# Altium PCB OSHparkMini.PcbDoc
Units mm, origin at the board's own origin, x right, y up, seen from the top; angles counter-clockwise.
Board outline 37 x 27 mm, 2 copper layers (Top Layer, Bottom Layer); 30 components, 26 nets, 147 pads, 17 vias.
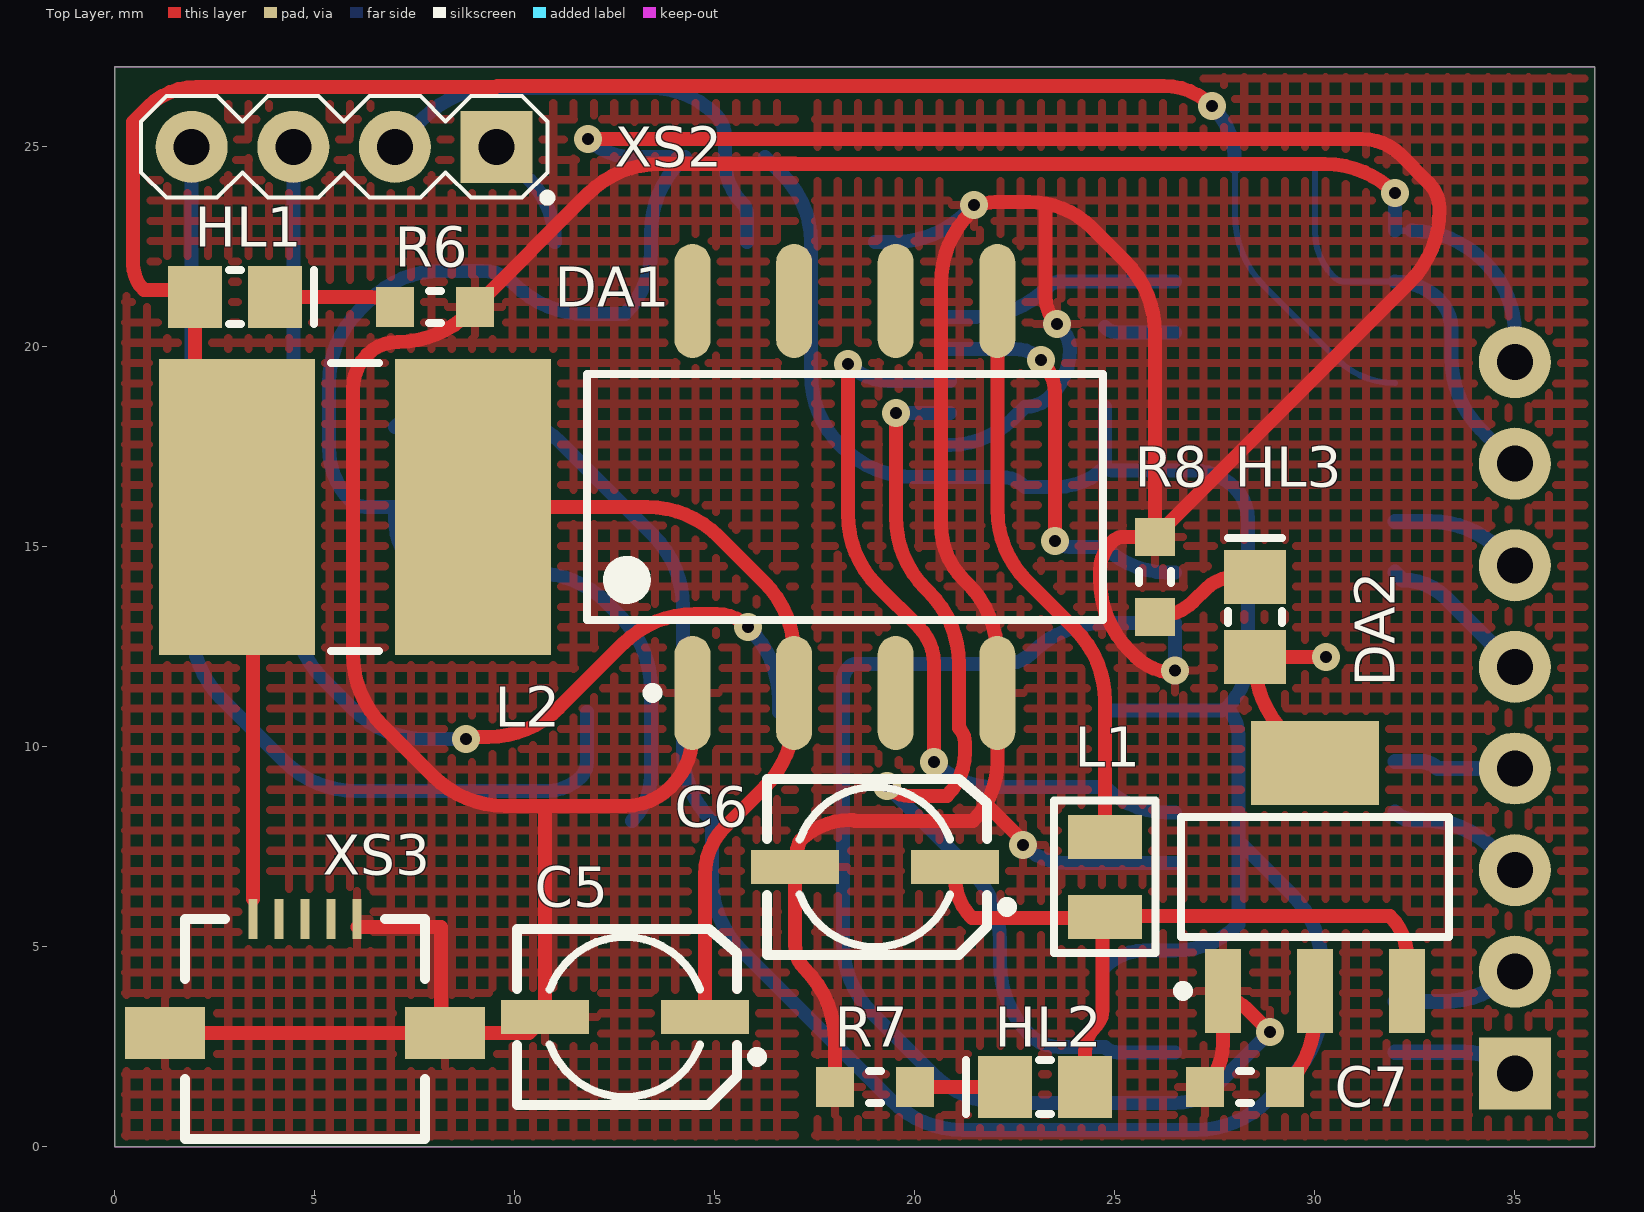
[diagram p0: Top Layer view]
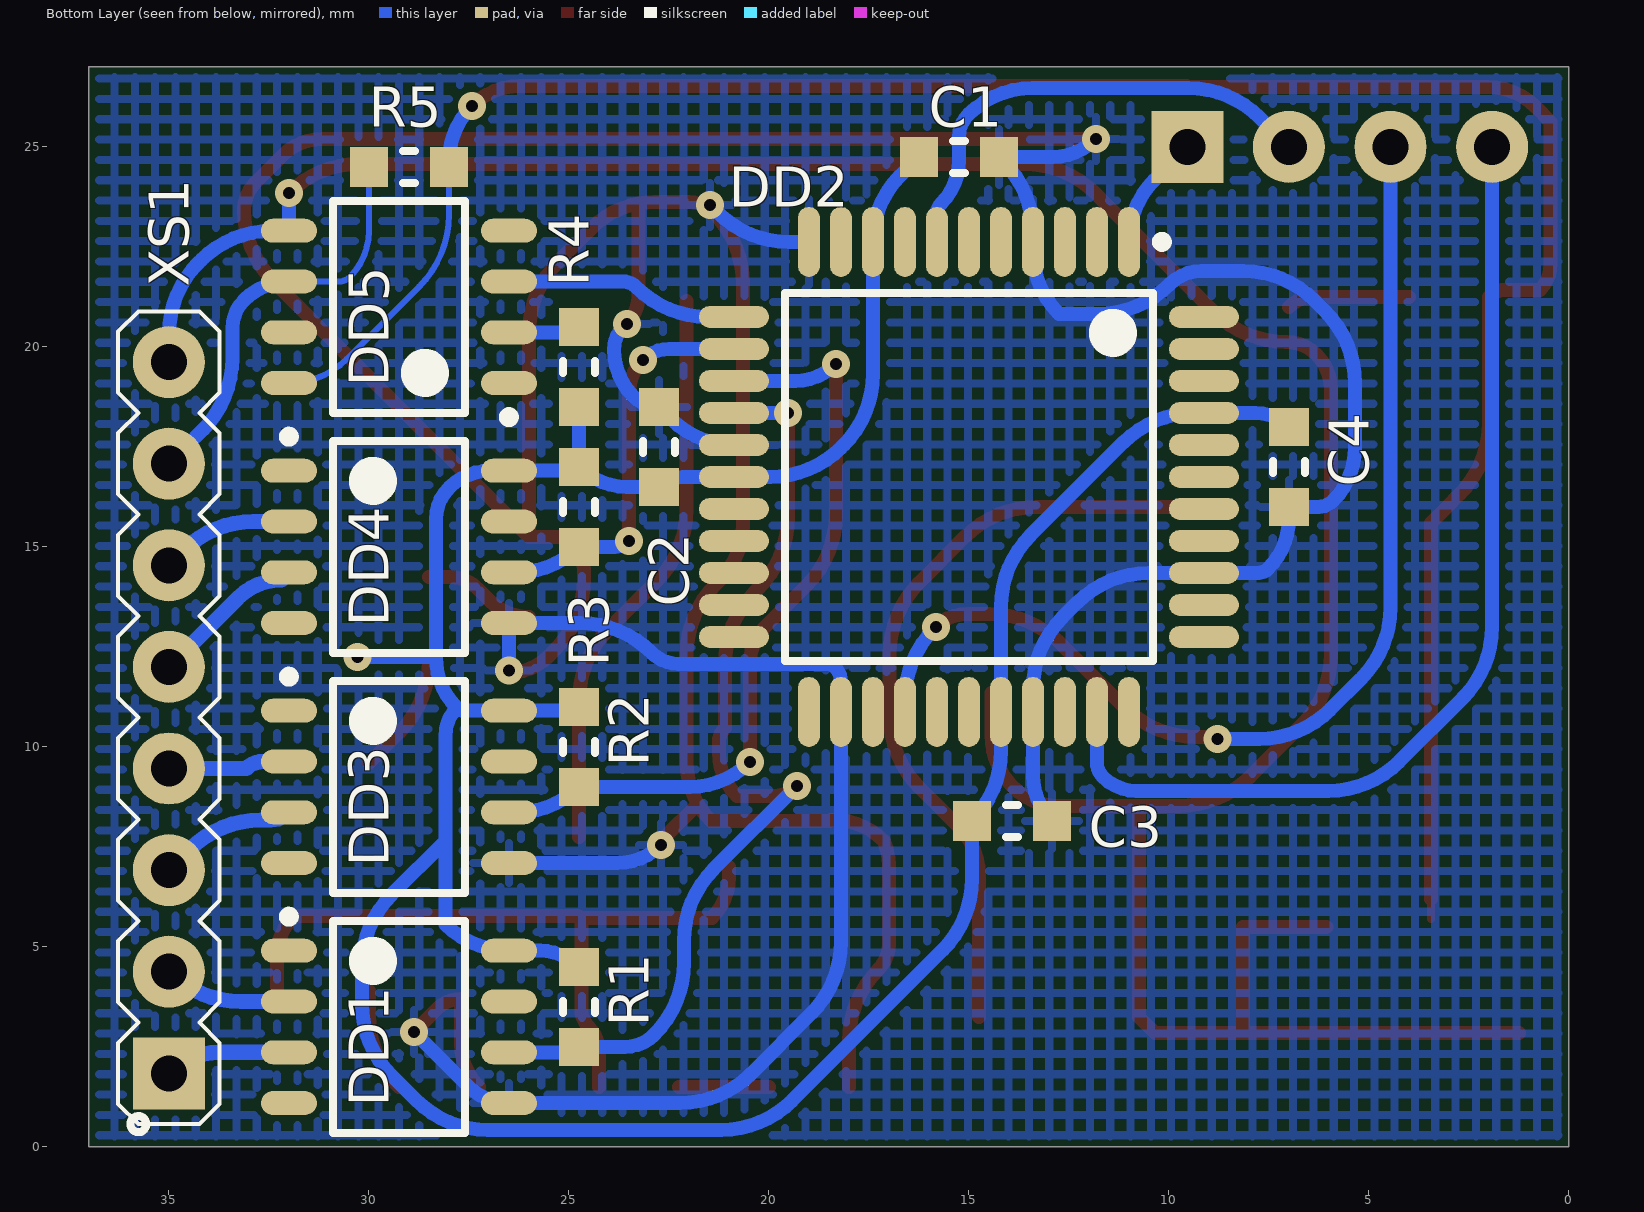
[diagram p1: Bottom Layer view, seen from below]

## Layer stack, top to bottom
Top Solder: solder mask 0.0102, Solder Resist, Dk 3.5
Top Layer: signal copper 0.0356
Dielectric 1: dielectric 0.32, FR-4, Dk 4.8
Bottom Layer: signal copper 0.0356
Bottom Solder: solder mask 0.0102, Solder Resist, Dk 3.5

## Board outline
0,0 0,27 37,27 37,0

## Design rules (kind name [scope] priority, off if disabled: settings)
AcuteAngle [All] p1: minimum=6.00000000000000E+0001 checktracksonly=FALSE
Clearance [All] p1: gap=0.152 ignorepadtopadclearanceinfootprint=FALSE
DiffPairsRouting [All] p1: maxlimit=0.254 minlimit=0.254 mostfreqgap=0.254 toplayer_minwidth=0.381 toplayer_maxwidth=0.381 toplayer_prefwidth=0.381 bottomlayer_minwidth=0.381 bottomlayer_maxwidth=0.381 bottomlayer_prefwidth=0.381 maxuncoupledlength=12.7
HoleSize "HoleSize plated" [PadIsPlated] p1: absolutevalues=TRUE maxlimit=3 minlimit=0.254 maxpercent=80.000 minpercent=20.000
HoleSize "HoleSize not plated" [Not PadIsPlated] p2: absolutevalues=TRUE maxlimit=3 minlimit=0.254 maxpercent=80.000 minpercent=20.000
HoleToHoleClearance [All] p1: gap=0.2 allowstackedmicrovias=TRUE
MinimumAnnularRing AnnularRing_VIA [IsVia] p1: minimumring=0.127
MinimumAnnularRing AnnularRing_PAD [IsPad] p2: minimumring=0.127
MinimumSolderMaskSliver [All] p1: minsoldermaskwidth=0.15
NetAntennae [All] p1: netantennaetolerance=1
PlaneClearance [All] p1: clearance=0.5
PlaneConnect [All] p1: planeconnectstyle=Relief reliefexpansion=0.2 reliefentries=4 reliefconductorwidth=0.2 reliefairgap=0.2
PolygonConnect [All] p1: connectstyle=Relief reliefconductorwidth=0.2 reliefentries=4 polygonreliefangle="90 Angle" airgapwidth=0.2
RoomDefinition main [InComponentClass('main')] p1: confinementstyle=ConfineIn formatcopy=TRUE lockcomponents=FALSE outline 0,-0.05 37.25,-0.05 37.25,27 0,27
RoutingVias [All] p1: holewidth=0.3 width=0.7 viastyle="Through Hole" minholewidth=0.3 minwidth=0.7 maxholewidth=0.3 maxwidth=0.7
SMDNeckDown [All] p1: percent=90.000
SMDToCorner [All] p1: distance=0
SilkToBoardRegionClearance [All] p1 off:
SilkToSilkClearance [All] p1: silktosilkclearance=0.2
SilkToSolderMaskClearance [IsPad] p1: minsilkscreentomaskgap=0.25 clearancetoexposedcopper=TRUE
SolderMaskExpansion [All] p1: expansion=0.05
Width [All] p1: maxlimit=1.5 minlimit=0.152 preferedwidth=0.35
20 further rules are at their usual default settings.

## Classes and differential pairs
net class QuadratureSignal: QA_N QA_P QB_N QB_P Z_N Z_P
differential pair Z: +Z_P -Z_N
differential pair QB: +QB_P -QB_N
differential pair QA: +QA_P -QA_N

## Components (designator, comment, footprint, x,y, rotation, side; value= is the part's Value field where it differs from the comment)
C1 "100n" SMDRC0603 15.25,24.75 r0 bottom
C2 "100n" SMDRC0603 22.75,17.5 r270 bottom
C3 "100n" SMDRC0603 13.925,8.15 r0 bottom
C4 "100n" SMDRC0603 7,17 r90 bottom
C5 "10 мк 16 В" CAP_POLAR_ELLYTE_B 12.75,3.25 r180 top
C6 "10 мк 16 В" CAP_POLAR_ELLYTE_B 19,7 r180 top
C7 "100n" SMDRC0603 28.25,1.5 r0 top
DA1 "AM1L-1205S-NZ" SOP254P1120X625-8M 18.25,16.25 r90 top
DA2 "LD1117A" SOT230P700X180-4L 30,6.75 r90 top
DD1 "HCPL-0601" HCPL-1601 29.25,3 r180 bottom
DD2 "EPM3064ATC44-10N" TQFP80P1200X1230X120-44N 15,16.75 r270 bottom
DD3 "HCPL-0601" HCPL-1601 29.25,9 r180 bottom
DD4 "HCPL-0601" HCPL-1601 29.25,15 r180 bottom
DD5 "HCPL-0601" HCPL-1601 29.25,21 r0 bottom
HL1 "KP-2012SGC" DIOMELF2012M 3,21.25 r0 top
HL2 "KP-2012SGC" DIOMELF2012M 23.25,1.5 r180 top
HL3 "KP-2012SGC" DIOMELF2012M 28.5,13.25 r90 top
L1 "10 мкГн" MLZ2012 24.75,6.75 r270 top
L2 "330 мкГн" INDP7972X50M 6,16 r180 top
R1 "1k" SMDRC0603 24.75,3.5 r90 bottom
R2 "1k" SMDRC0603 24.75,10 r90 bottom
R3 "1k" SMDRC0603 24.75,16 r90 bottom
R4 "100" SMDRC0603 24.75,19.5 r270 bottom
R5 "1k" SMDRC0603 29,24.5 r180 bottom
R6 "220" SMDRC0603 8,21 r180 top
R7 "220" SMDRC0603 19,1.5 r180 top
R8 "100" SMDRC0603 26,14.25 r270 top
XS1 "PLS-08R" PLS-08R1 35,1.84 r90 bottom
XS2 "PLS-4" PLS-04 9.54,25 r180 top
XS3 "5BFR" USB2.0microB 4.75,5.7 r180 top

## Footprints (in the part's own frame and the unit in brackets; to place one, negate y for a bottom-side part, rotate by r counter-clockwise, add the part's x,y. Pads: shape width x height; smd on the part's side, far side on the other; paste and mask are expansions set on the pad)
CAP_POLAR_ELLYTE_B [mm] "Surface Mount Aluminum Electrolytic (size code B)"
  rect 2.2x0.85 smd: 1(2,0) 2(-2,0)
  silkscreen extent -3.43,-2.2 2.7,2.2, body extent -2.3,-2.15 2.3,2.15, height 5.41
DIOMELF2012M [mm] "MELF Diode, 2-Leads, Body 2,00x1,20mm, IPC Low Density"
  rect 1.35x1.55 smd: 1(-1,0) 2(1,0)
  silkscreen extent -0.15,-0.67 1.97,0.67, body extent -1,-0.6 1,0.6, height 1.2
HCPL-1601 [mm] "SOIC, 8-Leads, Body 5,21x3,94mm, Pitch 1,27mm, IPC Medium Density"
  oval 1.4x0.6 smd: 1(-2.75,1.905) 2(-2.75,0.635) 3(-2.75,-0.635) 4(-2.75,-1.905) 5(2.75,-1.905) 6(2.75,-0.635) 7(2.75,0.635) 8(2.75,1.905)
  silkscreen extent -2.88,-2.65 1.65,2.88, body extent -3,-2.65 3,2.65, height 3.3
INDP7972X50M [mm] "Precision Wire Wound Inductor, 2-Leads, Body 7,90x7,20mm, IPC Low Density"
  rect 3.9x7.4 smd: 1(-2.95,0) 2(2.95,0)
  silkscreen extent -0.6,-3.6 0.6,3.6, body extent -3.95,-3.6 3.95,3.6, height 5
MLZ2012 [mm]
  rect 1.1x1.85 smd: 1(-1,0) 2(1,0)
  silkscreen extent -1.91,-1.27 1.91,1.27, body extent -1,-0.6 1,0.6, height 1.3
PLS-04 [mm] "вилка на плату"
  rect 1.8x1.8 hole 0.9: 1(0,0)
  round 1.8 hole 0.9: 2(2.54,0) 3(5.08,0) 4(7.62,0)
  silkscreen extent -1.37,-1.27 8.89,1.37, body extent -1.27,-1.25 8.89,1.25, height 8.6
PLS-08R1 [mm] "угловая вилка на плату"
  rect 1.8x1.8 hole 0.9: 1(0,0)
  round 1.8 hole 0.9: 2(2.54,0) 3(5.08,0) 4(7.62,0) 5(10.16,0) 6(12.7,0) 7(15.24,0) 8(17.78,0)
  silkscreen extent -1.47,-1.27 19.05,1.27, body extent -1.28,-1.25 19.05,6, height 6.1
SMDRC0603 [mm] "Chip Resistor, 2-Leads, Body 1,60x0,80mm, IPC Low Density"
  rect 0.95x1 smd: 1(-1,0) 2(1,0)
  silkscreen extent -0.15,-0.4 0.15,0.4, body extent -0.8,-0.4 0.8,0.4, height 0.45
SOP254P1120X625-8M [mm] "SOP, 8-Leads, Body 12,70x7,25mm, Pitch 2,54mm, IPC Low Density"
  oval 2.85x0.9 smd: 1(-4.9,3.81) 2(-4.9,1.27) 3(-4.9,-1.27) 4(-4.9,-3.81) 5(4.9,-3.81) 6(4.9,-1.27) 7(4.9,1.27) 8(4.9,3.81)
  silkscreen extent -5.02,-6.45 3.08,6.45, body extent -3.75,-6.45 3.75,6.45, height 6.25
SOT230P700X180-4L [mm] "SOT223, 4-Leads, Body 6,50x7,00mm (avg), Pitch 2,30mm, IPC High Density"
  rect 2.1x0.9 smd: 1(-2.85,2.3) 2(-2.85,0) 3(-2.85,-2.3)
  rect 2.1x3.2 smd: 4(2.85,0)
  silkscreen extent -2.97,-3.35 1.5,3.42, body extent -1.85,-3.35 1.85,3.35, height 1.8
TQFP80P1200X1230X120-44N [mm] "TQFP, 44-Leads, Body 10,00x10,00mm, Pitch 0,80mm, IPC Medium Density"
  oval 1.75x0.55 smd: 1(-5.875,4) 2(-5.875,3.2) 3(-5.875,2.4) 4(-5.875,1.6) 5(-5.875,0.8) 6(-5.875,0) 7(-5.875,-0.8) 8(-5.875,-1.6) 9(-5.875,-2.4) 10(-5.875,-3.2) 11(-5.875,-4) 23(5.875,-4) 24(5.875,-3.2) 25(5.875,-2.4) 26(5.875,-1.6) 27(5.875,-0.8) 28(5.875,0) 29(5.875,0.8) 30(5.875,1.6) 31(5.875,2.4) 32(5.875,3.2) 33(5.875,4)
  oval 0.55x1.75 smd: 12(-4,-5.875) 13(-3.2,-5.875) 14(-2.4,-5.875) 15(-1.6,-5.875) 16(-0.8,-5.875) 17(0,-5.875) 18(0.8,-5.875) 19(1.6,-5.875) 20(2.4,-5.875) 21(3.2,-5.875) 22(4,-5.875) 34(4,5.875) 35(3.2,5.875) 36(2.4,5.875) 37(1.6,5.875) 38(0.8,5.875) 39(0,5.875) 40(-0.8,5.875) 41(-1.6,5.875) 42(-2.4,5.875) 43(-3.2,5.875) 44(-4,5.875)
  silkscreen extent -6,-4.6 4.6,4.95, body extent -6,-6.15 6,6.15, height 1.2
USB2.0microB [mm]
  rect 0.225x1 smd: D+(0,0) D-(0.65,0) GND(-1.3,0) ID(-0.65,0) VCC(1.3,0)
  rect 2x1.3 smd: SHIELD(-3.5,2.85) SHIELD(3.5,2.85)
  silkscreen extent -3,0 3,5.5, body extent -3.89,0 3.89,5.49, height 2.59

## Part data
C1 C2 C3 C4 C7: library part "Capacitor 0603 100n", "Generic capasitor non-polar", Package=0603, ComponentLink1Description=Datasheet, PartNumber="Capacitor 0603 100n"
C5 C6: library part 10000_016, "10uF 16V Polar SMD cap", Manufacturer=YAGEO, ManufacturerPartNumber=CA016M0010REB-0405, Package=штырьевой, ComponentLink1Description=Datasheet, ComponentLink2Description=Datasheet-local, Price=3,03, Supplier=-
DA1: "DC/DC Isolation", Manufacturer=AIMTEC, Package=SMD-8, ComponentLink1Description=Datasheet, ComponentLink1URL=http://www.aimtec.com/site/Aimtec/files/Datasheet/HighResolution/AM1L-N-Z.pdf, ManufacturerPartNumber=AM1L-1205S-NZ, Price=166,68, Supplier=Диджитек
DA2: library part LD1117AS33TR, "LDO регулятор напряжения 3.3V 1.0A Positive", Manufacturer=STMicroelectronics, ComponentLink1Description=http://www.mouser.com/ds/2/389/CD00002116-250310.pdf, ComponentLink1URL=http://www.mouser.com/ds/2/389/CD00002116-250310.pdf, ManufacturerPartNumber=LD1117AS33TR, Price=45
DD1 DD3 DD4 DD5: library part HCPL-0601-500E, "OPTOISO 3.75KV OPN COLLECTOR 8SO", Case/Package=SOIC, Forward Current=50mA, Forward Voltage=1.75V, Input Current=15mA, Isolation Voltage=3.75kV, Manufacturer="Fairchild Semiconductor", Max Operating Temperature=85°C, Max Output Voltage=7V, Max Power Dissipation=85mW, Min Operating Temperature=-40°C, Package Quantity=3000, Reverse Breakdown Voltage=5V, Supplier Part Number 1=512-HCPL0601, ComponentLink1Description=https://datasheet.ciiva.com/4698/hcpl0601-185320-4698727.pdf, ComponentLink1URL=https://datasheet.ciiva.com/4698/hcpl0601-185320-4698727.pdf, ComponentLink2Description=https://datasheet.ciiva.com/11772/0900766b80d1f17b-11772100.pdf, ComponentLink2URL=https://datasheet.ciiva.com/11772/0900766b80d1f17b-11772100.pdf, ComponentLink3Description=https://datasheet.ciiva.com/26912/hcpl0601-26912362.pdf, ComponentLink3URL=https://datasheet.ciiva.com/26912/hcpl0601-26912362.pdf, ComponentLink4Description=https://datasheet.ciiva.com/2083/hcpl0611-2083487.pdf, ComponentLink4URL=https://datasheet.ciiva.com/2083/hcpl0611-2083487.pdf, ComponentLink5Description=https://datasheet.ciiva.com/26162/hcpl0611-26162959.pdf, ComponentLink5URL=https://datasheet.ciiva.com/26162/hcpl0611-26162959.pdf, ComponentLink6Description=https://datasheet.ciiva.com/26910/getdatasheetpartid-81668-26910220.pdf, ComponentLink6URL=https://datasheet.ciiva.com/26910/getdatasheetpartid-81668-26910220.pdf, ComponentLink7Description=https://datasheet.ciiva.com/8074/1796808-8074123.pdf, ComponentLink7URL=https://datasheet.ciiva.com/8074/1796808-8074123.pdf, ComponentLink8Description=https://datasheet.ciiva.com/8100/hcpl0611-8100123.pdf, ComponentLink8URL=https://datasheet.ciiva.com/8100/hcpl0611-8100123.pdf, Data Rate=10Mbps, Direction=Unidirectional, Fall Time=12ns, Height=3.43mm, Lead Free="Lead Free", Length=5.13mm, ManufacturerPartNumber=HCPL-0601, Max Input Current=15mA, Max Output Current=50mA, Mount="Surface Mount", Number of Channels=1, Number of Elements=1, Number of Pins=8, Output Current=50mA, Output Current per Channel=50mA, Output Voltage=7V, Packaging=Rail/Tube, Polarity=Inverting, Power Dissipation=85mW, Pricing 1="1=2.35, 10=2, 100=1.6, 500=1.4, 1000=1.16, 3000=1.07, 6000=1.03, 9000=0.958 (USD)", Propagation Delay=75ns, Radiation Hardening=No, REACH SVHC="No SVHC", Reverse Voltage (DC)=5V, Rise Time=50ns, Stock 1=5013, Supplier 1=Mouser, Turn-On Delay Time=75ns, Weight=0.252g, Width=4.16mm
DD2: library part EPM3064ATC44, "MAX 3000A, 64 MACROCELLS", Case/Package=TQFP, Frequency=125MHz, Manufacturer=Altera, Max Frequency=222.2MHz, Max Operating Temperature=70°C, Max Supply Voltage=3.6V, Min Operating Temperature=0°C, Min Supply Voltage=3V, Operating Supply Voltage=3.3V, Package Quantity=160, Supplier Part Number 1=544-1977-ND, ComponentLink1Description=https://datasheet.ciiva.com/1407/m3000a-1407040.pdf, ComponentLink1URL=https://datasheet.ciiva.com/1407/m3000a-1407040.pdf, ComponentLink2Description=https://datasheet.ciiva.com/1152/134639-1152985.pdf, ComponentLink2URL=https://datasheet.ciiva.com/1152/134639-1152985.pdf, ComponentLink3Description=https://datasheet.ciiva.com/25922/m3000a-25922153.pdf, ComponentLink3URL=https://datasheet.ciiva.com/25922/m3000a-25922153.pdf, ComponentLink4Description=https://datasheet.ciiva.com/5702/m3000a-5702171.pdf, ComponentLink4URL=https://datasheet.ciiva.com/5702/m3000a-5702171.pdf, ComponentLink5Description=https://datasheet.ciiva.com/1152/134639-1152983.pdf, ComponentLink5URL=https://datasheet.ciiva.com/1152/134639-1152983.pdf, ComponentLink6Description=https://datasheet.ciiva.com/1161/m3000a-1161336.pdf, ComponentLink6URL=https://datasheet.ciiva.com/1161/m3000a-1161336.pdf, ComponentLink7Description=https://datasheet.ciiva.com/5702/m3000a-5702168.pdf, ComponentLink7URL=https://datasheet.ciiva.com/5702/m3000a-5702168.pdf, Height=0.95mm, Lead Free="Lead Free", Length=10mm, ManufacturerPartNumber=EPM3064ATC44-10N, Memory Type=EEPROM, Mount="Surface Mount", Number of Gates=1250, Number of I/Os=34, Number of Inputs=34, Number of Logic Blocks (LABs)=4, Number of Logic Elements/Cells=4, Number of Macrocells=64, Number of Pins=44, Number of Programmable I/O=34, Packaging=Tray, Pricing 1="1=2.93 (USD)", Propagation Delay=10ns, Radiation Hardening=No, REACH SVHC=Unknown, Speed Grade=10, Stock 1=1163, Supplier 1=Digi-Key, Termination=SMD/SMT, Turn-On Delay Time=10ns, Width=10mm
HL1 HL2 HL3: library part LED1_G, "Diod LED SMD Green", Color=Green, ComponentLink1Description=Datasheet, ComponentLink2Description=Datasheet-local, ManufacturerPartNumber=KP-2012SGC, Price=2,88
L1: library part MLZ2012N100LT, "Катушка 500mA 10мкГн", Manufacturer=TDK, ManufacturerPartNumber=MPZ1608S181A, Package=2012, ComponentLink1Description=Datasheet, ComponentLink1URL=http://www.mouser.com/ds/2/400/inductor_commercial_decoupling_mlz_en-348849.pdf, ComponentLink2Description=Datasheet-local, Supplier=Промэлектроника
L2: library part SCD0705T-331K-N, "Inductor", ComponentLink1Description=Datasheet, ComponentLink1URL=http://download.siliconexpert.com/pdfs/2010/12/8/6/47/4/732/yageo_/manual/inductors_smdpower_scd_2010.pdf, ComponentLink2Description=Datasheet-local, ManufacturerPartNumber=SCD0705T-331K-N
R1 R2 R3 R5: library part "Resistor 0603 1k", "Generic resistor", Package=0603, ComponentLink1Description=Datasheet, ComponentLink1URL=http://www.mouser.com/ds/2/447/PYu-RC0402_51_RoHS_L_6_r-8721.pdf, PartNumber="Resistor 0603 1k"
R4 R8: library part "Resistor 0603 100", "Generic resistor", Package=0603, ComponentLink1Description=Datasheet, ComponentLink1URL=http://www.mouser.com/ds/2/447/PYu-RC0402_51_RoHS_L_6_r-8721.pdf, PartNumber="Resistor 0603 100"
R6 R7: library part "Resistor 0603 220", "Generic resistor", Package=0603, ComponentLink1Description=Datasheet, ComponentLink1URL=http://www.mouser.com/ds/2/447/PYu-RC0402_51_RoHS_L_6_r-8721.pdf, PartNumber="Resistor 0603 220"
XS1: library part "Con8_M PLS-08MR", "Male 8-pin connection", ComponentLink1Description=Datasheet, ComponentLink1URL=http://www.promelec.ru/catalog/406/1218/1223/1/99528/, ComponentLink2Description=Datasheet-local, ManufacturerPartNumber=PLS-08R, Price=1
XS2: library part Con4_M_PLS-4, "Male 4-pin connection", ComponentLink1Description=Datasheet, ComponentLink1URL=http://www.promelec.ru/catalog/406/1218/1224/1/24233/, ComponentLink2Description=Datasheet-local, ManufacturerPartNumber=PLS-4, Price=1
XS3: library part "USB2.0-microB 5BFR", "Роезтка microUSB угловая", Manufacturer=?, ManufacturerPartNumber="microUSB 5BFR", Note=5BFR, Price=29.91

## Via types
v1: diameter 0.7, hole 0.3, Top Layer to Bottom Layer, 17 vias

## Nets (pads, with @x,y where several pads share a name; then routed paths per layer and width w, separated by ;. In a path a pad name is that pad's centre, name@x,y a point inside that pad or via, vN(x,y) a via of type N, cw(c..) or ccw(c..) an arc to the next point about the centre after c; other vN are vias at no path point)
+3V_INT: C1.2 C2.2 C3.2 C4.2 C7.2 DA2.2 DA2.4 DD1.8 DD2.9 DD2.17 DD2.29 DD2.41 DD3.8 DD4.8 HL3.1 R1.2 R2.2 R3.2 R4.2 | length 88.9
  Top Layer w0.35: C7.2 29.256,1.506 ccw(c27.46,3.302) 30,3.302 DA2.2 ; DA2.4 29.244,10.356 cw(c31.04,12.152) 28.5,12.152 HL3.1 v1(30.279,12.25)
  Bottom Layer w0.35: C4.2 cw(c7.845,17.155) 7.845,18.35 DD2.41 9.348,18.35 cw(c9.348,15.81) 11.144,17.606 13.456,15.294 cw(c11.66,13.498) 14.2,13.498 DD2.29 14.2,9.9 ccw(c16.675,9.9) C3.2 14.925,6.702 ccw(c17.465,6.702) 15.669,4.906 19.406,1.169 ; C1.2 16.711,24.289 cw(c15.046,22.625) DD2.9 17.4,19.327 ccw(c19.94,19.327) 18.144,17.531 18.181,17.494 ccw(c19.977,19.29) 19.977,16.75 DD2.17 22.146,16.75 cw(c22.146,15.896) C2.2 23.543,16.5 ccw(c23.543,18.207) R3.2 ; 19.406,1.169 ccw(c21.202,2.965) 21.202,0.425 27.023,0.425 ccw(c27.023,2.965) 28.819,1.169 ; R1.2 cw(c25.728,3.522) 25.728,4.905 DD1.8 ccw(c26.5,7.15) 28.088,5.563 28.088,7.65 ; R2.2 ccw(c24.979,11.229) 24.979,10.905 DD3.8 27.631,10.905 ccw(c27.631,11.144) 27.8,10.975 ; R4.2 R3.2 ; 28.819,1.169 29.431,1.781 ccw(c27.635,3.577) 30.175,3.577 30.175,4.51 ccw(c27.635,4.51) 29.431,6.307 28.088,7.65 ; v1(30.279,12.25) ccw(c30.279,12.421) 30.4,12.3 cw(c30.261,12.439) 30.261,12.242 28.325,12.242 ; R3.2 ccw(c24.979,17.229) 24.979,16.905 DD4.8 26.962,16.905 cw(c26.962,15.437) 28,16.475 cw(c27.215,15.69) 28.325,15.69 28.325,12.242 ; 27.8,10.975 ccw(c26.533,12.242) 28.325,12.242 ; 27.8,10.975 cw(c27.106,10.281) 28.088,10.281 28.088,7.65
+5V_EXT: DD5.8 HL1.1 L2.2 R5.2 XS3.VCC | length 58.1
  Top Layer w0.203: XS3.VCC XS3.VCC@3.45,6.2
  Top Layer w0.35: XS3.VCC@3.45,6.2 3.45,15.6 L2.2 2.744,16.306 cw(c4.54,18.102) 2,18.102 HL1.1 ccw(c1.578,20.828) 1.578,21.425 0.725,21.425 cw(c1.372,22.072) 0.457,22.072 0.457,25.628 0.827,25.998 cw(c2.038,24.788) 2.038,26.5 9.525,26.5 cw(c9.585,26.44) 9.585,26.525 26.218,26.525 cw(c26.218,24.818) v1(27.425,26.025)
  Bottom Layer w0.152: R5.2 28,23.302 ccw(c30.54,23.302) 28.744,21.506 30.558,19.692 ccw(c32,21.135) DD5.8
  Bottom Layer w0.35: v1(27.425,26.025) cw(c26.037,24.637) 28,24.637 R5.2
+5V_INT: C6.2 DA2.3 HL2.1 L1.2 | length 18.2
  Top Layer w0.35: C6.2 21,6.751 ccw(c22.451,6.751) 21.425,5.725 L1.2@24.69,5.725 ; HL2.1 24.25,2.361 cw(c25.189,2.361) 24.525,3.025 ccw(c24.128,3.422) 24.69,3.422 L1.2@24.69,5.725 ; DA2.3 32.3,4.749 ccw(c30.849,4.749) 31.875,5.775 24.81,5.775 ccw(c24.81,5.604) L1.2@24.69,5.725
GND: C1.1 C2.1 C3.1 C4.1 C6.1 C7.1 DA1.4 DA2.1 DD1.5 DD2.4 DD2.11 DD2.16 DD2.24 DD2.30 DD2.36 DD3.5 DD4.5 R7.2 R8.1 | length 160
  Top Layer w0.35: v1(11.825,25.2) 31.165,25.2 cw(c31.165,23.794) 32.16,24.788 32.833,24.115 cw(c32.139,23.422) 32.867,24.078 cw(c32.139,23.422) 33.118,23.474 cw(c32.139,23.422) 33.12,23.422 cw(c30.58,23.422) 32.376,21.626 R8.1 ; R7.2 18,2.648 ccw(c15.46,2.648) 17.256,4.444 cw(c17.874,5.062) 17,5.062 C6.1 17,7.028 cw(c18.622,7.028) 17.123,7.649 cw(c18.394,6.379) 18.394,8.175 18.45,8.175 ccw(c18.51,8.235) 18.51,8.15 21.45,8.15 ccw(c19.977,9.623) 21.777,8.574 ; v1@22.781,7.469 v1(22.7,7.55) ccw(c22.457,7.55) 22.629,7.722 21.777,8.574 ; v1(23.55,20.575) cw(c24.246,21.271) 23.262,21.271 23.262,23.588 ; v1(26.5,11.91) ccw(c26.585,11.91) 26.525,11.85 cw(c26.525,13.299) 25.501,12.274 25.369,12.406 cw(c27.165,14.202) 24.625,14.202 24.625,14.401 cw(c25.649,14.401) 24.925,15.125 cw(c25.227,14.823) 25.227,15.25 R8.1 ; C7.1 ccw(c26.164,2.586) 27.7,2.586 27.7,3.7 cw(c27.7,2.855) 28.297,3.453 v1(28.875,2.875) ; 21.777,8.574 ccw(c19.977,9.623) 22.06,9.623 DA1.4 22.06,12.288 ccw(c19.52,12.288) 21.316,14.084 21.225,14.175 cw(c22.613,15.563) 20.65,15.563 20.65,21.573 cw(c23.19,21.573) 21.394,23.369 cw(c22.012,22.751) 22.012,23.625 22.856,23.625 cw(c22.856,21.406) 23.262,23.588 ; 23.262,23.588 cw(c22.856,21.406) 24.425,22.975 25.256,22.144 cw(c23.46,20.348) 26,20.348 R8.1
  Bottom Layer w0.35: v1(11.825,25.2) ccw(c12.911,26.286) 12.911,24.75 C1.1 14.144,24.644 ccw(c15.94,22.848) 13.4,22.848 DD2.4 13.4,22.394 cw(c11.181,22.394) 12.75,20.825 11.777,20.825 cw(c11.777,23.365) 9.981,21.569 ccw(c9.182,20.77) 9.182,21.9 8.152,21.9 ccw(c8.152,19.36) 6.356,21.156 6.094,20.894 ccw(c7.89,19.098) 5.35,19.098 5.35,17.478 ccw(c7.228,17.478) 5.9,16.15 ccw(c6.262,16.512) 6.262,16 C4.1 7,15.717 ccw(c8.792,15.717) 7.525,14.45 ccw(c7.766,14.691) 7.766,14.35 DD2.36 10.498,14.35 cw(c10.498,11.81) 12.294,13.606 12.656,13.244 cw(c10.86,11.448) 13.4,11.448 DD2.30 13.4,9.297 cw(c11.778,9.297) C3.1 ; DD2.11 19.498,22.625 ccw(c19.498,25.165) 21.294,23.369 v1(21.475,23.55) ; DD2.16 ccw(c20.875,19.783) 22.454,18.204 C2.1 ccw(c22.75,19.405) 23.39,18.765 ccw(c22.22,19.936) 23.875,19.936 ccw(c23.116,19.936) 23.653,20.472 v1(23.55,20.575) ; v1(22.7,7.55) ccw(c23.798,8.648) 23.798,7.095 DD3.5 ; v1(26.5,11.91) DD4.5 24.722,13.095 ccw(c24.722,10.555) 22.926,12.351 cw(c22.264,13.013) 22.264,12.077 18.536,12.077 ccw(c18.536,11.814) 18.35,12 ccw(c18.712,11.638) 18.2,11.638 DD2.24 18.2,5.127 ccw(c20.74,5.127) 18.944,3.331 20.436,1.839 ccw(c22.232,3.635) 22.232,1.095 DD1.5 ccw(c26.5,2.531) 27.516,1.516 v1(28.875,2.875)
GND_EXT: C5.1 DA1.1 DD5.5 R6.1 XS1.8 XS3.GND XS3.SHIELD | length 73.4
  Top Layer w0.35: XS3.SHIELD@1.25,2.85 8.15,2.85 8.15,5.5 XS3.GND@6.062,5.5 ; XS3.SHIELD@8.25,2.85 10.35,2.85 C5.1 10.75,8.344 ccw(c10.494,8.344) 10.675,8.525 ; DA1.1 14.44,10.304 cw(c12.596,10.304) 13.9,9 cw(c12.753,10.147) 12.753,8.525 10.675,8.525 ; v1(32,23.846) ccw(c30.241,22.088) 31.02,24.45 ccw(c30.241,22.088) 30.241,24.575 13.627,24.575 ccw(c13.627,22.035) 11.831,23.831 R6.1 8.869,20.869 cw(c7.073,22.665) 7.073,20.125 ccw(c7.073,19.044) 6.308,19.808 ccw(c7.173,18.943) 5.95,18.943 5.95,12.327 ccw(c8.49,12.327) 6.694,10.531 7.956,9.269 ccw(c9.752,11.065) 9.752,8.525 10.675,8.525
  Bottom Layer w0.152: DD5.5 DD5.5@32.415,22.905
  Bottom Layer w0.35: DD5.5 v1(32,23.846) ; DD5.5@32.415,22.905 cw(c32.415,20.381) 32.443,22.905 cw(c32.415,20.381) 34.2,22.166 34.256,22.11 cw(c32.46,20.314) 35,20.314 XS1.8
NetC5_2: C5.2 DA1.2 L2.1 | length 19.8
  Top Layer w0.35: L2.1 13.298,16 cw(c13.298,13.46) 15.094,15.256 16.236,14.114 cw(c14.44,12.318) 16.98,12.318 DA1.2 16.98,10.782 cw(c14.44,10.782) 16.236,8.986 15.25,8 ccw(c16.457,6.793) 14.75,6.793 C5.2
NetDA1_5: DA1.5 L1.1 | length 14.3
  Top Layer w0.35: DA1.5 22.06,15.942 ccw(c24.6,15.942) 22.804,14.146 24.006,12.944 cw(c22.21,11.148) 24.75,11.148 L1.1
NetDD2_1: DD2.1 XS2.1 | length 2.9
  Bottom Layer w0.35: XS2.1 10.353,24.187 cw(c8.791,22.625) DD2.1
NetDD2_7: DD2.7 XS2.2 | length 12.1
  Bottom Layer w0.35: XS2.2 7.731,25.731 cw(c9.527,23.935) 9.527,26.475 13.395,26.475 cw(c13.395,24.17) 15.025,25.8 cw(c14.482,25.257) 15.25,25.257 15.25,24.661 ccw(c16.786,24.661) 15.7,23.575 cw(c15.459,23.334) 15.8,23.334 DD2.7
NetDD2_26: DD2.26 XS2.3 | length 28.1
  Top Layer w0.35: v1(8.779,10.2) ccw(c8.779,10.371) 8.9,10.25 9.323,10.25 ccw(c9.323,12.79) 11.119,10.994 12.706,12.581 cw(c14.502,10.785) 14.502,13.325 15.04,13.325 cw(c15.04,12.215) v1(15.825,13)
  Bottom Layer w0.35: XS2.3 4.46,13.492 ccw(c7,13.492) 5.204,11.696 5.956,10.944 ccw(c7.752,12.74) 7.752,10.2 v1(8.779,10.2) ; v1(15.825,13) 15.856,12.969 cw(c14.06,11.173) 16.6,11.173 DD2.26
NetDD2_32: DD2.32 XS2.4 | length 25.6
  Bottom Layer w0.35: XS2.4 1.92,13.007 ccw(c4.46,13.007) 2.664,11.211 4.231,9.644 ccw(c6.027,11.44) 6.027,8.9 10.805,8.9 ccw(c10.805,10.095) 11.65,9.25 ccw(c11.288,9.612) 11.8,9.612 DD2.32
NetDD5_2: DD5.2 R4.1 | length 1.8
  Bottom Layer w0.35: R4.1 ccw(c25.076,20.826) 25.076,20.365 DD5.2
NetHL1_2: HL1.2 R6.2 | length 3.1
  Top Layer w0.35: HL1.2 6.396,21.25 cw(c6.396,20.396) R6.2
NetHL2_2: HL2.2 R7.1 | length 2.2
  Top Layer w0.35: R7.1 HL2.2
NetHL3_2: HL3.2 R8.2 | length 2.8
  Top Layer w0.35: R8.2 ccw(c26,14.638) 26.982,13.657 27.275,13.95 cw(c27.999,13.226) 27.999,14.25 HL3.2
out: DD5.6 R5.1 XS1.7 | length 10.4
  Bottom Layer w0.152: R5.1 30,22.897 ccw(c31.622,22.897) 30.475,21.75 ccw(c30.753,22.028) 30.753,21.635 DD5.6 ; 34.319,17.761 XS1.7
  Bottom Layer w0.35: DD5.6 cw(c32,20.055) 33.117,21.172 cw(c32.396,20.451) 33.416,20.451 33.416,19.716 ccw(c35.956,19.716) 34.16,17.92 34.319,17.761
out_cpld: DD2.12 DD5.3 | length 5.9
  Bottom Layer w0.35: DD2.12 21.523,20.75 ccw(c21.523,23.29) 23.319,21.494 cw(c23.659,21.153) 23.659,21.635 DD5.3
qa_cpld: DD2.13 DD4.6 R3.1 | length 10.2
  Top Layer w0.35: v1(23.15,19.675) cw(c22.305,18.83) 23.5,18.83 v1(23.5,15.15)
  Bottom Layer w0.35: DD2.13 22.486,19.95 cw(c22.486,19.011) v1(23.15,19.675) ; v1(23.5,15.15) ccw(c23.862,15.512) 23.862,15 R3.1 ccw(c26.283,16.533) 26.283,14.365 DD4.6
QA_N: DD4.3 XS1.5 | length 3.9
  Bottom Layer w0.381: DD4.3 32.19,14.174 cw(c32.19,12.641) 33.275,13.725 XS1.5
QA_P: DD4.2 XS1.6 | length 3.3
  Bottom Layer w0.381: DD4.2 32.89,15.635 cw(c32.89,13.186) 34.622,14.918 XS1.6
qb_cpld: DD2.14 DD3.6 R2.1 | length 19.7
  Top Layer w0.35: v1(18.325,19.575) 18.325,15.821 ccw(c20.865,15.821) 19.069,14.025 20.1,12.994 cw(c19.195,12.088) 20.475,12.088 v1(20.475,9.625)
  Bottom Layer w0.35: v1(18.325,19.575) ccw(c19.351,20.601) 19.351,19.15 DD2.14 ; v1(20.475,9.625) ccw(c21.984,11.134) 21.984,9 R2.1 ccw(c26.283,10.533) 26.283,8.365 DD3.6
QB_N: DD3.3 XS1.3 | length 3.5
  Bottom Layer w0.381: DD3.3 ccw(c32.46,8.825) 32.46,8.174 32.693,8.174 cw(c32.693,5.634) 34.489,7.431 XS1.3
QB_P: DD3.2 XS1.4 | length 3
  Bottom Layer w0.381: DD3.2 32.643,9.635 cw(c32.643,9.038) 33.065,9.46 XS1.4
z_cpld: DD1.6 DD2.15 R1.1 | length 24.3
  Top Layer w0.35: v1(19.3,9.025) 19.325,9 ccw(c19.868,9.543) 19.868,8.775 20.8,8.775 ccw(c19.714,9.861) 21.25,9.861 21.25,10.113 ccw(c20.738,10.113) 21.1,10.475 21.1,12.073 ccw(c18.56,12.073) 20.356,13.869 20.269,13.956 cw(c22.065,15.752) 19.525,15.752 v1(19.525,18.35)
  Bottom Layer w0.35: v1(19.3,9.025) 21.381,6.944 cw(c19.585,5.148) 22.125,5.148 22.125,4.602 ccw(c24.665,4.602) 22.869,2.806 ccw(c23.608,3.545) 23.608,2.5 R1.1 ccw(c25.076,2.826) 25.076,2.365 DD1.6 ; v1@19.58,18.35 DD2.15
Z_N: DD1.3 XS1.1 | length 3.1
  Bottom Layer w0.381: DD1.3 33.733,2.365 cw(c33.733,0.573) XS1.1
Z_P: DD1.2 XS1.2 | length 3.2
  Bottom Layer w0.381: DD1.2 33.203,3.635 ccw(c33.203,6.175) 34.999,4.379 XS1.2
pads on no net: DA1.3 DA1.6 DA1.7 DA1.8 DD1.1 DD1.4 DD1.7 DD2.2 DD2.3 DD2.5 DD2.6 DD2.8 DD2.10 DD2.18 DD2.19 DD2.20 DD2.21 DD2.22 DD2.23 DD2.25 DD2.27 DD2.28 DD2.31 DD2.33 DD2.34 DD2.35 DD2.37 DD2.38 DD2.39 DD2.40 DD2.42 DD2.43 DD2.44 DD3.1 DD3.4 DD3.7 DD4.1 DD4.4 DD4.7 DD5.1 DD5.4 DD5.7 XS3.D+ XS3.D- XS3.ID

## Polygon pours and split planes (outlines as drawn)
GND on Top Layer "g_t" (solid, remove dead copper, pour order 14): 37,0 37,27 17.5,27 17.5,0
GND_EXT on Top Layer "g_b" (solid, remove dead copper, pour order 12): 0,-0.05 0,27 17,27 17,-0.004
GND on Bottom Layer "g_b" (hatched 90Degree grid 0.508 track 0.203, remove dead copper, pour order 16): 0,27 0,0 37,0 37,27

## Keep-outs
Keep-Out Layer:
  the board outline again, w0.01